# Altium PCB 节能组取电V2.PcbDoc
Units mm, origin at the board's own origin, x right, y up, seen from the top; angles counter-clockwise.
Board outline 136 x 56.51 mm, 2 copper layers (Top Layer, Bottom Layer); 32 components, 11 nets, 74 pads, 1 vias.
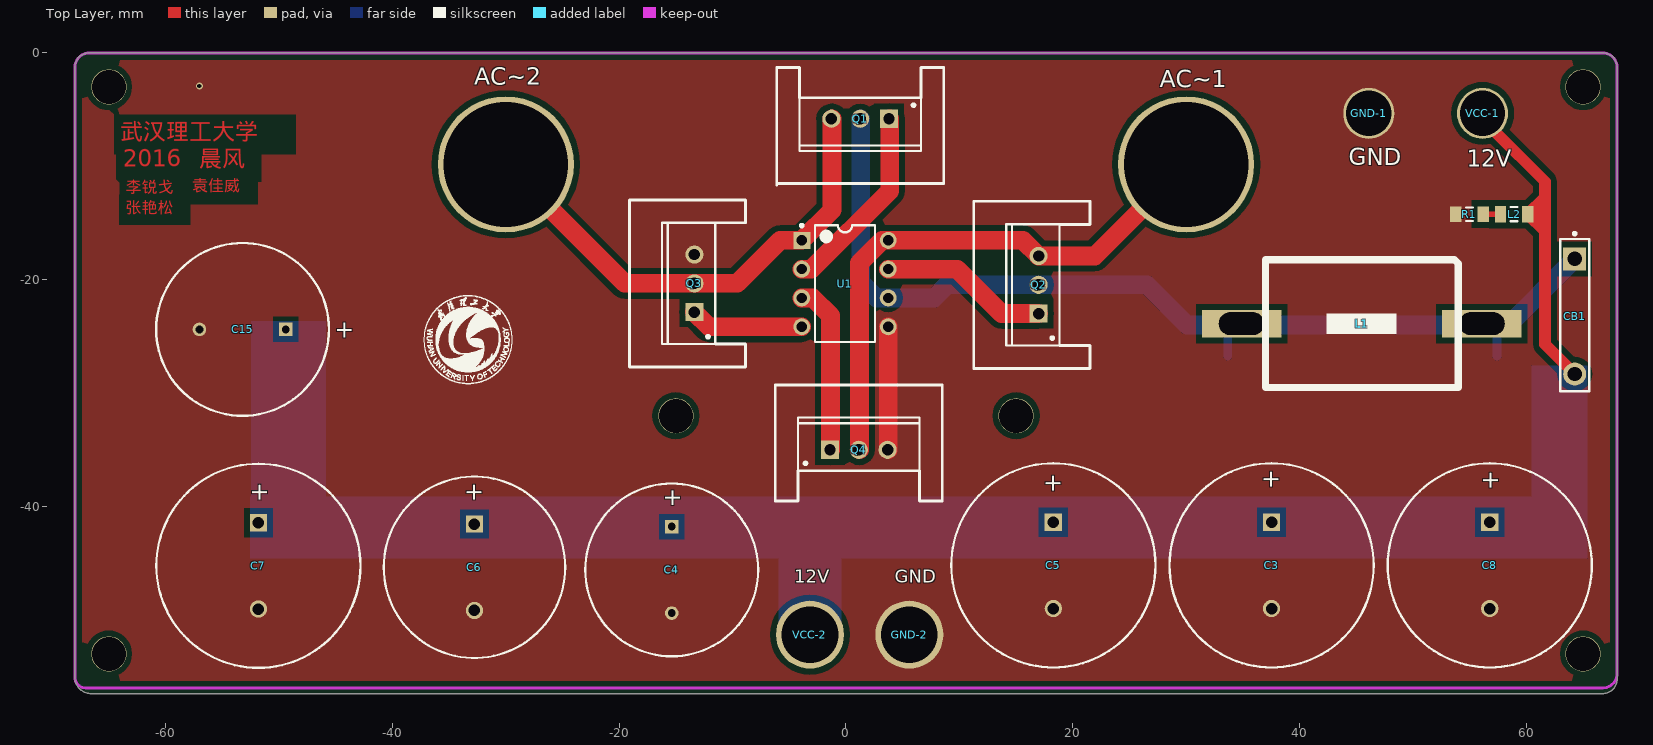
[diagram p0: Top Layer view]
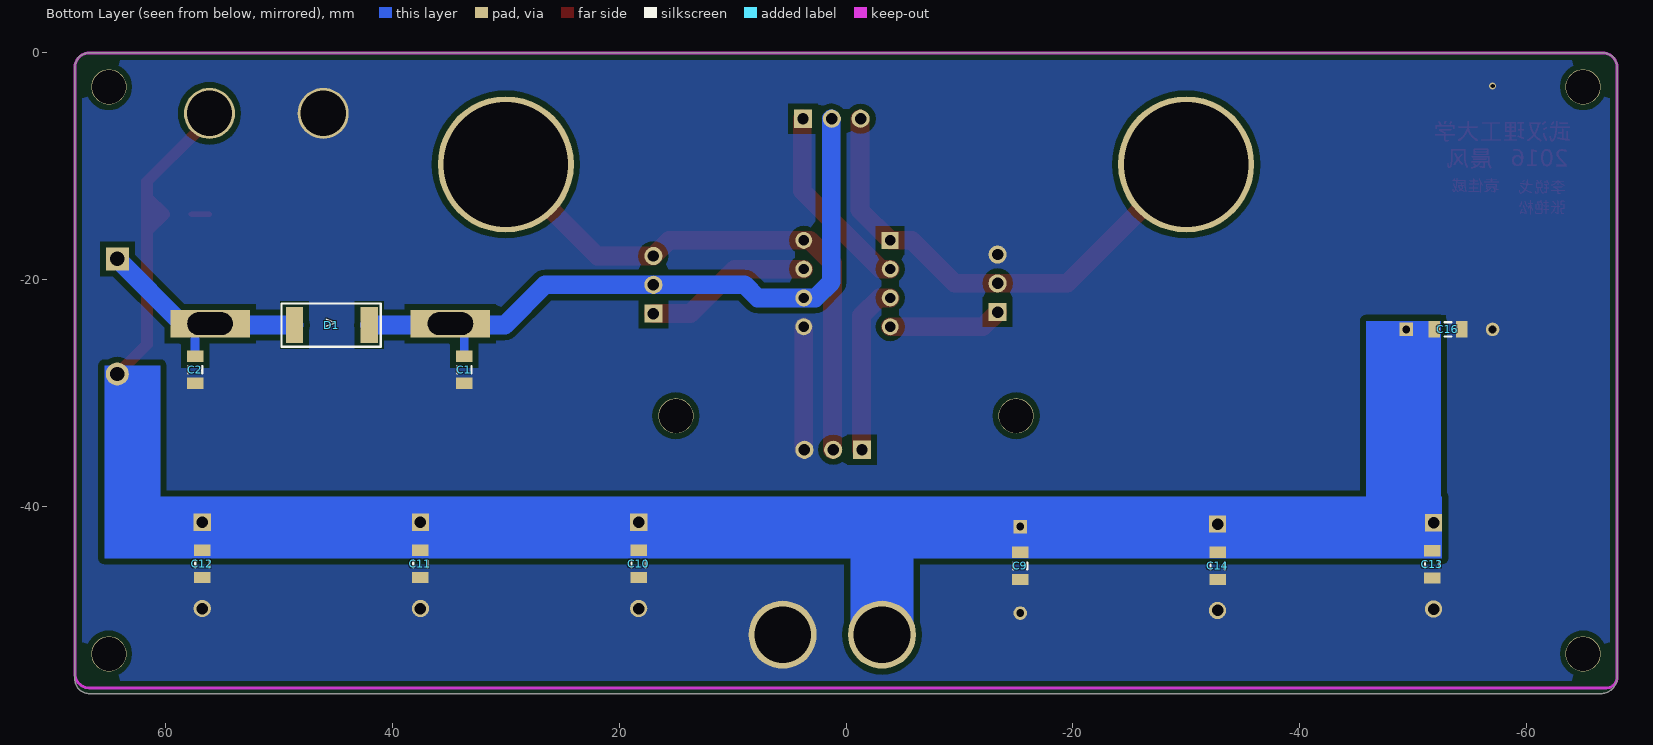
[diagram p1: Bottom Layer view, seen from below]
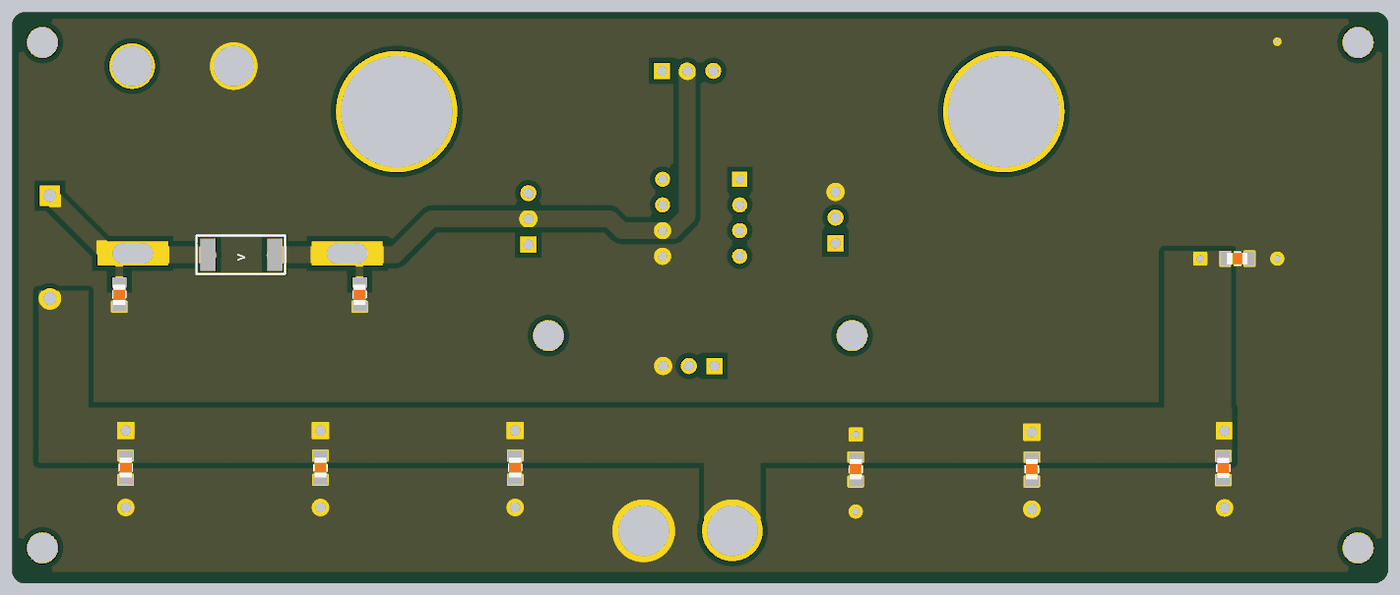
[diagram p2: 3D render of the assembled board from below, using the file's embedded part models]

## Layer stack, top to bottom
Top Layer: signal copper 0.0356
Dielectric: dielectric 0.32, FR-4, Dk 4.8
Bottom Layer: signal copper 0.0356

## Board outline
-68,-55.063 -68,-1.27 cw(c-66.73,-1.27) -66.73,0 66.73,0 cw(c66.73,-1.27) 68,-1.27 68,-55.235 cw(c66.73,-55.235) 66.73,-56.505 -66.558,-56.505 cw(c-66.558,-55.063)

## Design rules (kind name [scope] priority, off if disabled: settings)
Clearance [All] p1: gap=0.508
PolygonConnect [All] p1: connectstyle=Direct reliefconductorwidth=0.254 reliefentries=4 polygonreliefangle="90 Angle" airgapwidth=0.254
RoutingVias [All] p1: holewidth=0.711 width=1.27 viastyle="Through Hole" minholewidth=0.711 minwidth=1.27 maxholewidth=0.711 maxwidth=1.27
SolderMaskExpansion [All] p1: expansion=0.102
Width [All] p1: maxlimit=2.032 minlimit=0.254 preferedwidth=1.016 minimp=50.000000 maximp=50.000000 favimp=50.000000
28 further rules are at their usual default settings.

## Components (designator, comment, footprint, x,y, rotation, side; value= is the part's Value field where it differs from the comment)
AC~1 "PIN" PIN#1 30,-9.835 r0 top
AC~2 "PIN" PIN#1 -30,-9.835 r0 top
C1 "Cap Pol1" C2012 33.655,-27.94 r270 bottom
C2 "Cap Pol1" C2012 57.404,-27.94 r270 bottom
C3 "Cap Pol1" RB7.6-15#1 37.529,-45.192 r90 top
C4 "Cap Pol1" RB7.6-15#2 -15.367,-45.593 r90 top
C5 "Cap Pol1" RB7.6-15#1 18.288,-45.192 r90 top
C6 "Cap Pol1" RB7.6-15#1 -32.766,-45.359 r90 top
C7 "Cap Pol1" RB7.6-15#1 -51.816,-45.232 r90 top
C8 "Cap Pol1" RB7.6-15#1 56.769,-45.192 r90 top
C9 "Cap" C2012 -15.367,-45.232 r90 bottom
C10 "Cap" C2012 18.288,-45.065 r90 bottom
C11 "Cap" C2012 37.529,-45.065 r90 bottom
C12 "Cap" C2012 56.769,-45.065 r90 bottom
C13 "Cap" C2012 -51.689,-45.105 r90 bottom
C14 "Cap" C2012 -32.766,-45.232 r90 bottom
C15 "Cap Pol1" RB7.6-15#2 -53.213,-24.384 r0 top
C16 "Cap" C2012 -53.086,-24.384 r0 bottom
CB1 "Circuit Breaker" SPST-2 64.262,-20.701 r270 top
D1 "Diode 1N4001" SK54 45.339,-24.003 r180 bottom
GND-1 "PIN" PIN#2 46.101,-5.334 r0 top
GND-2 "PIN" PIN#3 5.588,-51.308 r0 top
L1 "33uH" SMD-EC-F16 38.862,-23.876 r0 top
L2 "LED" C2012 58.918,-14.224 r180 top
Q1 "MOSFET-N" mos 1.889,-6.061 r270 top
Q2 "MOSFET-N" mos 16.73,-21.086 r180 top
Q3 "MOSFET-N" mos -13.623,-20.959 r180 top
Q4 "MOSFET-N" mos 0.492,-34.746 r90 top
R1 "Res" R2012 54.981,-14.224 r180 top
U1 "LT4320-DIP" DIP-8 -0.089,-20.34 r0 top
VCC-1 "PIN" PIN#2 56.134,-5.334 r90 top
VCC-2 "PIN" PIN#3 -3.175,-51.308 r0 top

## Footprints (in the part's own frame and the unit in brackets; to place one, negate y for a bottom-side part, rotate by r counter-clockwise, add the part's x,y. Pads: shape width x height; smd on the part's side, far side on the other; paste and mask are expansions set on the pad)
C2012 [mm] "Chip Capacitor, 2-Leads, Body 2.0x1.2mm, IPC Low Density"
  rect 1x1.45 smd: 1(-1.2,0) 2(1.2,0)
  silkscreen extent -0.3,-0.63 0.3,0.63, body extent -0.98,-0.6 1.02,0.6, height 0.5
DIP-8 [mm] "DIP; 8 Leads; Row Spacing 7.62 mm; Pitch 2.54 mm"
  rect 1.5x1.5 hole 0.9: 1(-3.81,3.81)
  round 1.5 hole 0.9: 2(-3.81,1.27) 3(-3.81,-1.27) 4(-3.81,-3.81) 5(3.81,-3.81) 6(3.81,-1.27) 7(3.81,1.27) 8(3.81,3.81)
  silkscreen extent -3.93,-5.15 2.65,5.23, body extent -3.6,-5.15 3.6,5.15, height 5.08
mos [mm]
  rect 1.6x1.6 hole 1: 1(-0.254,1.905)
  round 1.6 hole 1: 2(-0.254,-0.635) 3(-0.254,-3.175)
  silkscreen extent -2.1,-5.99 2.6,4.72, body extent -2.15,-6.04 2.65,4.77, height 19.3
PIN#1 [mm]
  round 12 hole 11: 1(0,0)
PIN#2 [mm]
  round 4.5 hole 4: 1(0,0)
PIN#3 [mm]
  round 6 hole 5: 1(0,0)
R2012 [mm] "Chip Resistor, 2-Leads, Body 2.0x1.2mm, IPC Low Density"
  rect 1x1.4 smd: 1(-1.2,0) 2(1.2,0)
  silkscreen extent -0.3,-0.6 0.3,0.6, body extent -0.98,-0.6 1.02,0.6, height 0.5
RB7.6-15#1 [mil] "Polarized Capacitor (Radial); 2 Leads"
  rect 60x60 hole 40: 1(150,0)
  round 60 hole 40: 2(-150,0)
  silkscreen extent -354,-354 354,354
RB7.6-15#2 [mil] "Polarized Capacitor (Radial); 2 Leads"
  rect 47.24x47.24 hole 27.56: 1(150,0)
  round 47.24 hole 27.56: 2(-150,0)
  silkscreen extent -300,-300 300,300
SK54 [mm]
  rect 1.52x3.18 smd: 1(-3.305,0) 2(3.305,0)
  silkscreen extent -4.44,-1.91 4.32,1.91
SMD-EC-F16 [mm]
  rect 7x2.4 hole 2 slot 4 at 0 deg: 1(-3.973,0) 2(17.215,0)
  silkscreen extent -1.88,-5.64 15.12,5.64
SPST-2 [mil] "Switch; 2 Leads"
  rect 80x80 hole 50: 1(-100,0)
  round 80 hole 50: 2(300,0)
  silkscreen extent -192,-50 360,50

## Part data
C1 C2 C3 C4 C5 C6 C7 C8 C15: "Polarized Capacitor (Radial)"
C9 C10 C11 C12 C13 C14 C16: "Capacitor"
D1: "1 Amp General Purpose Rectifier"
L1: library part Inductor, "Inductor"
Q1 Q2 Q3 Q4: "N-Channel MOSFET"
R1: "贴片电阻"

## Free pads (board coordinates)
  round 3.1 hole 3: 0(-65,-3) 1(65,-3) 2(65,-53) 3(-65,-53) 4(-15,-32) 5(15,-32)

## Via types
v1: diameter 0.635, hole 0.381, Top Layer to Bottom Layer, 1 vias

## Nets (pads, with @x,y where several pads share a name; then routed paths per layer and width w, separated by ;. In a path a pad name is that pad's centre, name@x,y a point inside that pad or via, vN(x,y) a via of type N, cw(c..) or ccw(c..) an arc to the next point about the centre after c; other vN are vias at no path point)
12V: C3.1 C4.1 C5.1 C6.1 C7.1 C8.1 C9.2 C10.2 C11.2 C12.2 C13.2 C14.2 C15.1 C16.2 CB1.2 L2.1 VCC-1.1 VCC-2.1 | length 30.2
  Top Layer w1.016: VCC-1.1@57.15,-6.858 61.642,-11.35 61.642,-12.7 ; CB1.2 61.642,-25.701 61.642,-15.748 ; L2.1 61.642,-15.748 ; L2.1 61.642,-12.7 ; L2.1 61.642,-14.224 ; 61.642,-15.748 61.642,-14.224 ; 61.642,-14.224 61.642,-12.7
AC~1: AC~1.1 Q2.3 Q4.2 U1.8 | length 50
  Top Layer w1.651: Q4.2@1.181,-35 1.181,-18.557 3.208,-16.53 U1.8 15.603,-16.53 Q2.3 21.924,-17.911 AC~1.1
AC~2: AC~2.1 Q1.3 Q3.2 U1.1 | length 43.8
  Top Layer w1.651: AC~2.1 -19.511,-20.324 Q3.2 -9.598,-20.324 -5.804,-16.53 U1.1 -1.232,-13.863 Q1.3@-1.232,-5.807
GND: C1.2 C2.2 C3.2 C4.2 C5.2 C6.2 C7.2 C8.2 C9.1 C10.1 C11.1 C12.1 C13.1 C14.1 C15.2 C16.1 GND-1.1 GND-2.1 Q3.3 Q4.3 R1.2 U1.5 | length 10.9
  Top Layer w1.651: Q4.3@3.721,-35 U1.5
  other v1: -57.023,-2.921
NetC2_1: C2.1 CB1.1 D1.1 L1.2 | length 19.6
  Bottom Layer w0.762: C2.1 57.404,-25.203
  Bottom Layer w1.651: D1.1 58.42,-24.003 CB1.1
NetL2_2: L2.2 R1.1 | length 1.5
  Top Layer w0.508: R1.1 L2.2
NetQ1_1: Q1.1 U1.2 | length 17
  Top Layer w1.651: U1.2 -3.048,-19.07 3.848,-12.174 Q1.1@3.848,-5.807
NetQ2_1: Q2.1 U1.7 | length 14.9
  Top Layer w1.651: U1.7 9.817,-19.07 13.738,-22.991 Q2.1
NetQ3_1: Q3.1 U1.4 | length 10
  Top Layer w1.651: Q3.1 -12.083,-24.15 U1.4
NetQ4_1: Q4.1 U1.3 | length 15
  Top Layer w1.651: U1.3 -2.921,-21.61 -1.359,-23.172 Q4.1@-1.359,-35
VCC: C1.1 D1.2 L1.1 Q1.2 Q2.2 U1.6 | length 59.3
  Bottom Layer w0.762: C1.1 33.655,-25.11
  Bottom Layer w1.651: Q1.2@1.308,-5.807 1.308,-20.213 2.705,-21.61 U1.6 7.785,-21.61 8.944,-20.451 Q2.2 26.547,-20.451 30.099,-24.003 D1.2

## Polygon pours and split planes (outlines as drawn)
GND on Top Layer "Top Layer-GND" (solid, remove dead copper): 68.072,0.127 68.072,-56.007 49.276,-56.007 -68,-56.007 -68,-42.291 -68,0 -52.578,0
GND on Bottom Layer "Top Layer-GND" (solid, remove dead copper, pour order 5): -61.214,0 -68,0 -68,-3.556 -68,-56 -57.404,-56 68,-56 68,-37.592 68,0 66.167,0

## Keep-outs
Keep-Out Layer:
  lines w0.254: -68,-55.063 ccw(c-67.063,-55.063) -67.063,-56 -65,-56 65,-56 66.73,-56 ccw(c66.73,-54.73) 68,-54.73 68,-54.301 68,-2.341 68,-1.27 ccw(c66.73,-1.27) 66.73,0 65,0 -65,0 -66.73,0 ccw(c-66.73,-1.27) -68,-1.27 -68,-1.96 -68,-55.063

## Other copper
Top Layer:
  text "武汉理工大学" at -63.998,-8.128 h2.54
  text "2016" at -63.744,-10.541 h2.54 r0.25
  text "晨风" at -57.013,-10.541 h2.54
  text "袁佳威" at -57.648,-12.573 h1.78
  text "李锐戈" at -63.5,-12.7 h1.78
  text "张艳松" at -63.5,-14.478 h1.78
Bottom Layer:
  rectangle net 12V: -52.451,-42.037 -45.847,-23.622
  rectangle net 12V: -5.969,-51.435 -0.381,-42.799
  rectangle net 12V: -52.578,-44.577 65.405,-39.116
  rectangle net 12V: 60.452,-44.196 65.405,-27.559

## Silkscreen, mask and mechanical layers (free items; w line width, h text height)
Top Overlay:
  drawing of 2377 lines, arcs and shapes, not listed
  text "GND" at 44.323,-10.414 h2.54
  text "12V" at 54.737,-10.541 h2.54
  text "12V" at -4.572,-47.117 h2
  text "GND" at 4.318,-47.117 h2
Bottom Overlay:
  text "<" at 44.831,-24.638 h1.78
Mechanical 15:
  lines w0.254: 0,-94 0,6

## Text inside footprints (layer, text, board x,y; h text height)
C3: Top Overlay "+" at 38.163,-38.481 h1.5 r90
C4: Top Overlay "+" at -14.605,-40.132 h1.5 r90
C5: Top Overlay "+" at 18.923,-38.842 h1.5 r90
C6: Top Overlay "+" at -32.131,-39.644 h1.5 r90
C7: Top Overlay "+" at -51.054,-39.644 h1.5 r90
C8: Top Overlay "+" at 57.531,-38.568 h1.5 r90
C15: Top Overlay "+" at -45.081,-25.121 h1.5